# Altium PCB PCB1.PcbDoc
Units mil, origin at the board's own origin, x right, y up, seen from the top; angles counter-clockwise.
Board outline 8750 x 3800 mil, 2 copper layers (Top Layer, Bottom Layer); 78 components, 69 nets, 287 pads, 19 vias.
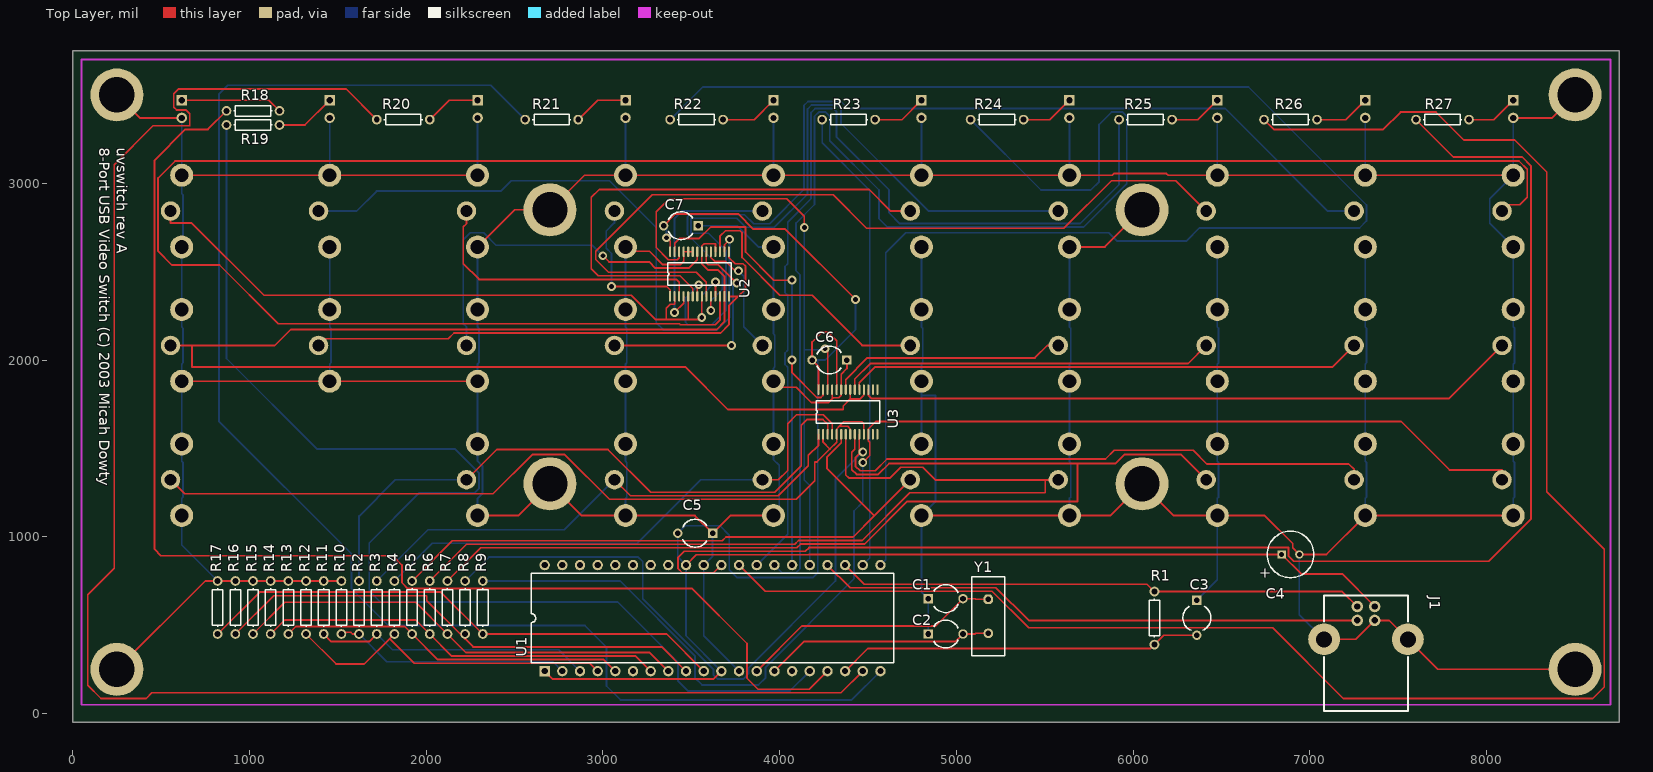
[diagram p0: Top Layer view]
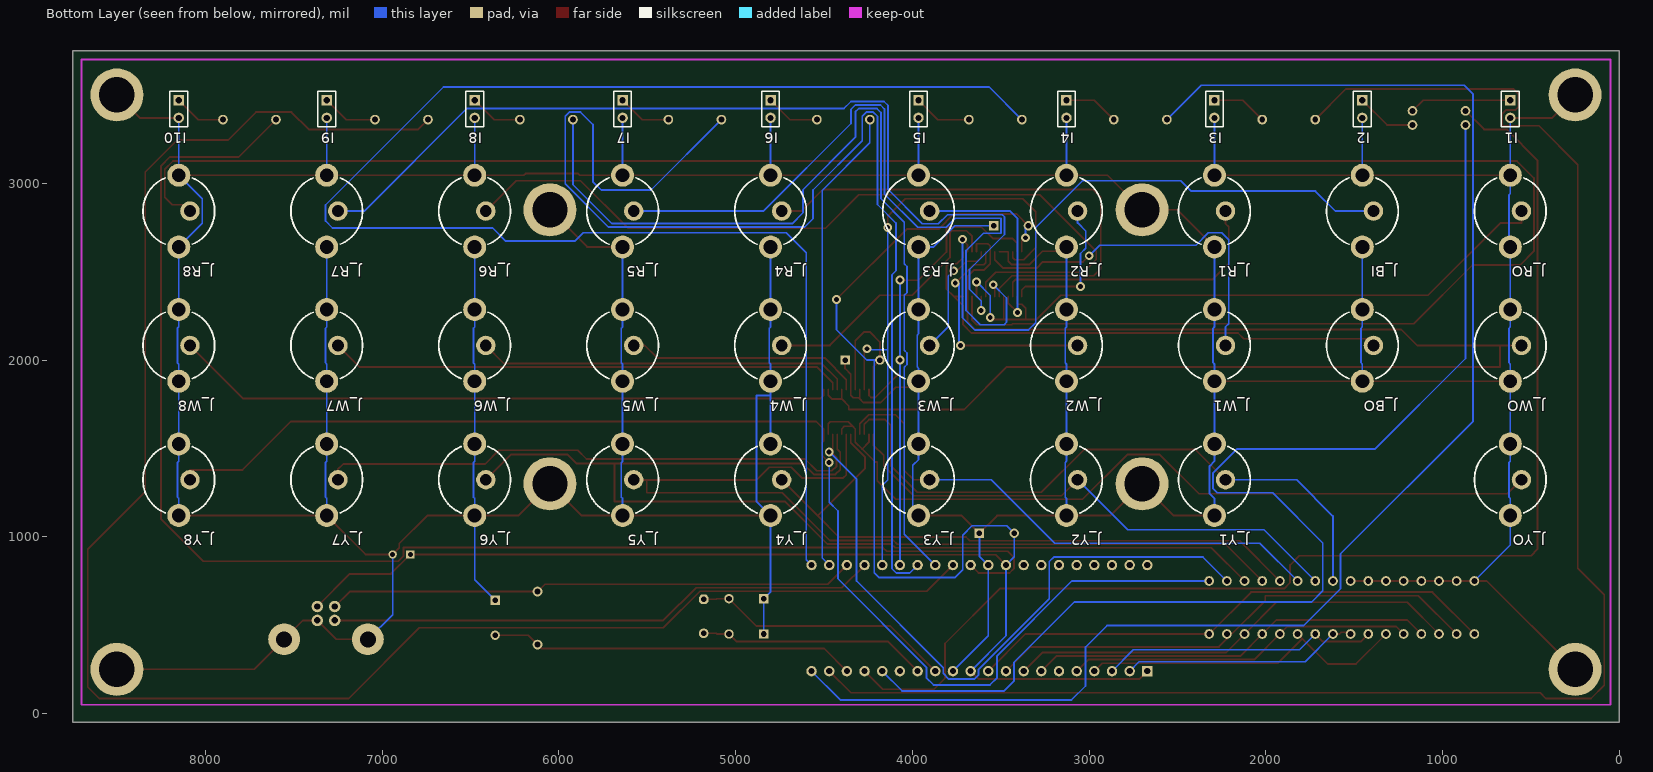
[diagram p1: Bottom Layer view, seen from below]

## Layer stack, top to bottom
Top Layer: signal copper 1.4
Dielectric: dielectric 12.6, FR-4, Dk 4.8
Bottom Layer: signal copper 1.4

## Board outline
0,-50 8750,-50 8750,3750 0,3750

## Design rules (kind name [scope] priority, off if disabled: settings)
Clearance [All] p1: gap=10
ComponentClearance [All] p1: gap=10 collisioncheckmode=0
HoleSize [All] p1: absolutevalues=TRUE maxlimit=200 minlimit=1 maxpercent=80.000 minpercent=20.000
PolygonConnect [All] p1: connectstyle=Relief reliefconductorwidth=10 reliefentries=4 polygonreliefangle="90 Angle"
RoomDefinition Sheet1 [InComponentClass('Sheet1')] p1: confinementstyle=ConfineIn formatcopy=TRUE outline 0,0 8750,0 8750,3750 0,3750
RoutingLayers [All] p1: top layer=Horizontal bottom layer=Vertical
RoutingVias [All] p1: holewidth=28 width=50 viastyle="Through Hole" minholewidth=28 minwidth=50 maxholewidth=28 maxwidth=50
SolderMaskExpansion [All] p1: expansion=4
TestPointUsage [All] p1: valid=0 allowmultiple=FALSE
Testpoint [All] p1: side=15 testpointundercomponent=TRUE minsize=40 maxsize=100 preferedsize=60 minholesize=0 maxholesize=40 preferedholesize=32 testpointgrid=1 style=1023 order=-539222988
Width [All] p1: maxlimit=10 minlimit=10 preferedwidth=10
15 further rules are at their usual default settings.

## Components (designator, comment, footprint, x,y, rotation, side; value= is the part's Value field where it differs from the comment)
C1 "Cap2" CAPR5-4X5 4840,650 r0 top
C2 "Cap2" CAPR5-4X5 4840,450 r0 top
C3 "" CAPR5-4X5 6360,640 r270 top
C4 "10uF" CAP-EE-1 6740,900 r180 top
C5 "" CAPR5-4X5 3620,1020 r180 top
C6 "" CAPR5-4X5 4380,2000 r180 top
C7 "" CAPR5-4X5 3540,2760 r180 top
I1 "" HDR1X2 616.67,3470 r270 bottom
I2 "" HDR1X2 1453.7,3470 r270 bottom
I3 "" HDR1X2 2290.74,3470 r270 bottom
I4 "" HDR1X2 3127.78,3470 r270 bottom
I5 "" HDR1X2 3964.81,3470 r270 bottom
I6 "" HDR1X2 4801.85,3470 r270 bottom
I7 "" HDR1X2 5638.89,3470 r270 bottom
I8 "" HDR1X2 6475.92,3470 r270 bottom
I9 "" HDR1X2 7312.96,3470 r270 bottom
I10 "" HDR1X2 8150,3470 r270 bottom
J1 "USB" USB-TYPEB 7080,420 r0 top
J_BI "" RCJ-02X 1453.7,3045.51 r270 bottom
J_BO "" RCJ-02X 1453.7,2285.51 r270 bottom
J_R1 "" RCJ-02X 2290.74,3045.51 r270 bottom
J_R2 "" RCJ-02X 3127.78,3045.51 r270 bottom
J_R3 "" RCJ-02X 3964.81,3045.51 r270 bottom
J_R4 "" RCJ-02X 4801.85,3045.51 r270 bottom
J_R5 "" RCJ-02X 5638.89,3045.51 r270 bottom
J_R6 "" RCJ-02X 6475.92,3045.51 r270 bottom
J_R7 "" RCJ-02X 7312.96,3045.51 r270 bottom
J_R8 "" RCJ-02X 8150,3045.51 r270 bottom
J_RO "" RCJ-02X 616.67,3045.51 r270 bottom (schematic designator J_YO)
J_W1 "" RCJ-02X 2290.74,2285.51 r270 bottom
J_W2 "" RCJ-02X 3127.78,2285.51 r270 bottom
J_W3 "" RCJ-02X 3964.81,2285.51 r270 bottom
J_W4 "" RCJ-02X 4801.85,2285.51 r270 bottom
J_W5 "" RCJ-02X 5638.89,2285.51 r270 bottom
J_W6 "" RCJ-02X 6475.92,2285.51 r270 bottom
J_W7 "" RCJ-02X 7312.96,2285.51 r270 bottom
J_W8 "" RCJ-02X 8150,2285.51 r270 bottom
J_WO "" RCJ-02X 616.67,2285.51 r270 bottom
J_Y1 "" RCJ-02X 2290.74,1525.51 r270 bottom
J_Y2 "" RCJ-02X 3127.78,1525.51 r270 bottom
J_Y3 "" RCJ-02X 3964.81,1525.51 r270 bottom
J_Y4 "" RCJ-02X 4801.85,1525.51 r270 bottom
J_Y5 "" RCJ-02X 5638.89,1525.51 r270 bottom
J_Y6 "" RCJ-02X 6475.92,1525.51 r270 bottom
J_Y7 "" RCJ-02X 7312.96,1525.51 r270 bottom
J_Y8 "" RCJ-02X 8150,1525.51 r270 bottom
J_YO "" RCJ-02X 616.67,1525.51 r270 bottom
R1 "Res1" AXIAL-0.3 6120,540 r90 top
R2 "" AXIAL-0.3 1620,600 r270 top
R3 "" AXIAL-0.3 1720,600 r270 top
R4 "" AXIAL-0.3 1820,600 r270 top
R5 "" AXIAL-0.3 1920,600 r270 top
R6 "" AXIAL-0.3 2020,600 r270 top
R7 "" AXIAL-0.3 2120,600 r270 top
R8 "" AXIAL-0.3 2220,600 r270 top
R9 "" AXIAL-0.3 2320,600 r270 top
R10 "" AXIAL-0.3 1520,600 r90 top
R11 "" AXIAL-0.3 1420,600 r90 top
R12 "" AXIAL-0.3 1320,600 r90 top
R13 "" AXIAL-0.3 1220,600 r90 top
R14 "" AXIAL-0.3 1120,600 r90 top
R15 "" AXIAL-0.3 1020,600 r90 top
R16 "" AXIAL-0.3 920,600 r90 top
R17 "" AXIAL-0.3 820,600 r90 top
R18 "" AXIAL-0.3 1020,3410 r180 top
R19 "" AXIAL-0.3 1020,3330 r180 top
R20 "" AXIAL-0.3 1870,3360 r180 top
R21 "" AXIAL-0.3 2710,3360 r180 top
R22 "" AXIAL-0.3 3530,3360 r180 top
R23 "" AXIAL-0.3 4390,3360 r180 top
R24 "" AXIAL-0.3 5230,3360 r180 top
R25 "" AXIAL-0.3 6070,3360 r180 top
R26 "" AXIAL-0.3 6890,3360 r180 top
R27 "" AXIAL-0.3 7750,3360 r180 top
U1 "PIC16C765" DIP-40 3620,540 r0 top
U2 "MAX4572" SSOP28 3380,2360 r90 top
U3 "MAX4572" SSOP28 4220,1580 r90 top
Y1 "6 MHz" BCY-W2/E4.7 5180,550 r270 top

## Footprints (in the part's own frame and the unit in brackets; to place one, negate y for a bottom-side part, rotate by r counter-clockwise, add the part's x,y. Pads: shape width x height; smd on the part's side, far side on the other; paste and mask are expansions set on the pad)
AXIAL-0.3 [mm]
  round 1.4 hole 0.85: 1(-3.81,0) 2(3.81,0)
  silkscreen extent -2.77,-0.76 2.77,0.76
BCY-W2/E4.7 [mm]
  oct 1.4x1.4 hole 0.8: 1(-2.44,0)
  round 1.4 hole 0.8: 2(2.44,0)
  silkscreen extent -5.7,-2.35 5.7,2.35
CAP-EE-1 [mm]
  rect 1.2x1.2 hole 0.7: 1(-2.54,0)
  round 1.2 hole 0.7: 2(-5.08,0)
  silkscreen extent -7.15,-3.34 -0.47,3.34
CAPR5-4X5 [mm]
  rect 1.35x1.35 hole 0.8: 1(0,0)
  round 1.35 hole 0.8: 2(5,0)
  silkscreen extent 0.81,-2 4.32,2
DIP-40 [mm]
  rect 1.5x1.5 hole 0.9: 1(-24.13,-7.62)
  round 1.5 hole 0.9: 2(-21.59,-7.62) 3(-19.05,-7.62) 4(-16.51,-7.62) 5(-13.97,-7.62) 6(-11.43,-7.62) 7(-8.89,-7.62) 8(-6.35,-7.62) 9(-3.81,-7.62) 10(-1.27,-7.62) 11(1.27,-7.62) 12(3.81,-7.62) 13(6.35,-7.62) 14(8.89,-7.62) 15(11.43,-7.62) 16(13.97,-7.62) 17(16.51,-7.62) 18(19.05,-7.62) 19(21.59,-7.62) 20(24.13,-7.62) 21(24.13,7.62) 22(21.59,7.62) 23(19.05,7.62) 24(16.51,7.62) 25(13.97,7.62) 26(11.43,7.62) 27(8.89,7.62) 28(6.35,7.62) 29(3.81,7.62) 30(1.27,7.62) 31(-1.27,7.62) 32(-3.81,7.62) 33(-6.35,7.62) 34(-8.89,7.62) 35(-11.43,7.62) 36(-13.97,7.62) 37(-16.51,7.62) 38(-19.05,7.62) 39(-21.59,7.62) 40(-24.13,7.62)
  silkscreen extent -26.05,-6.45 26.05,6.45
HDR1X2 [mm]
  rect 1.5x1.5 hole 0.9: 1(0,0)
  round 1.5 hole 0.9: 2(2.54,0)
  silkscreen extent -1.27,-1.27 3.81,1.27
RCJ-02X [mil]
  round 110 hole 66.93: 1(202.76,62.99)
  round 130 hole 78.74: 2(0,0) 2(405.51,0)
  silkscreen extent 15,-203 391,203
SSOP28 [mm]
  rect 1.5x0.3 smd: 1(0,0)
  oval 1.5x0.3 smd: 2(0,-0.65) 3(0,-1.3) 4(0,-1.95) 5(0,-2.6) 6(0,-3.25) 7(0,-3.9) 8(0,-4.55) 9(0,-5.2) 10(0,-5.85) 11(0,-6.5) 12(0,-7.15) 13(0,-7.8) 14(0,-8.45) 15(6.42,-8.45) 16(6.42,-7.8) 17(6.42,-7.15) 18(6.42,-6.5) 19(6.42,-5.85) 20(6.42,-5.2) 21(6.42,-4.55) 22(6.42,-3.9) 23(6.42,-3.25) 24(6.42,-2.6) 25(6.42,-1.95) 26(6.42,-1.3) 27(6.42,-0.65) 28(6.42,0)
  silkscreen extent 1.59,-8.78 4.83,0.33
USB-TYPEB [mil]
  round 65 hole 36.22: 1(286.22,185.43) 2(187.8,185.43) 3(187.8,106.69) 4(286.22,106.69)
  round 180 hole 90.55: 5(0,0) 5(474.02,0)
  silkscreen extent 0,-406 474,248

## Part data
C1 C2: "Capacitor"
C3 C5 C6 C7: library part Cap2, "Capacitor"
C4: library part "Cap Pol1", "Polarized Capacitor (Radial)"
I1 I2 I3 I4 I5 I6 I7 I8 I9 I10: library part LED1, "Typical RED GaAs LED"
J1: library part "USB Type B", "Header, 4-Pin"
J_BI J_BO J_R1 J_R2 J_R3 J_R4 J_R5 J_R6 J_R7 J_R8 J_RO J_W1 J_W2 J_W3 J_W4 J_W5 J_W6 J_W7 J_W8 J_WO J_Y1 J_Y2 J_Y3 J_Y4 J_Y5 J_Y6 J_Y7 J_Y8 J_YO: library part RCA-COMPACT, "RCA Connector"
R1: "Resistor"
R2 R3 R4 R5 R6 R7 R8 R9 R10 R11 R12 R13 R14 R15 R16 R17 R18 R19 R20 R21 R22 R23 R24 R25 R26 R27: library part Res1, "Resistor"
U1: "EPROM-Based 8-Bit CMOS Microcontroller with USB"
U2 U3: "Serially Controlled, Clickless Audio/Video switch"
Y1: library part XTAL, "Crystal Oscillator"

## Free pads (board coordinates)
  round 300 hole 200: 0(250,250) 0(250,3500) 0(2700,1300) 0(2700,2850) 0(6050,1300) 0(6050,2850) 0(8500,250) 0(8500,3500)

## Via types
v1: diameter 50, hole 28, Top Layer to Bottom Layer, 19 vias

## Nets (pads, with @x,y where several pads share a name; then routed paths per layer and width w, separated by ;. In a path a pad name is that pad's centre, name@x,y a point inside that pad or via, vN(x,y) a via of type N, cw(c..) or ccw(c..) an arc to the next point about the centre after c; other vN are vias at no path point)
GND: C1.1 C2.1 C3.1 C4.2 C5.1 C6.1 C7.1 I1.2 I2.2 I3.2 I4.2 I5.2 I6.2 I7.2 I8.2 I9.2 I10.2 J1.4 J1.5 J_BI.2 J_BO.2 J_R1.2 J_R2.2 J_R3.2 J_R4.2 J_R5.2 J_R6.2 J_R7.2 J_R8.2 J_RO.2 J_W1.2 J_W2.2 J_W3.2 J_W4.2 J_W5.2 J_W6.2 J_W7.2 J_W8.2 J_WO.2 J_Y1.2 J_Y2.2 J_Y3.2 J_Y4.2 J_Y5.2 J_Y6.2 J_Y7.2 J_Y8.2 J_YO.2 pad.0 R10.2 R11.2 R12.2 R13.2 R14.2 R15.2 R16.2 R17.2 U1.12 U1.31 U2.23 U2.24 U2.25 U3.23 U3.25 | length 43302.9
  Top Layer w10: pad.0@250,250 750,750 R17.2 R16.2 R15.2 R14.2 R13.2 R12.2 R11.2 R10.2 ; pad.0@250,3500 380,3370 I1.2 ; J_WO.2@616.67,1880 1453.7,1880 J_W1.2@2290.74,1880 ; J_RO.2@616.67,3045.51 1453.7,3045.51 J_R1.2@2290.74,3045.51 ; J_Y1.2@2290.74,1120 2520,1120 2700,1300 2880,1120 3127.78,1120 3520,1120 C5.1 3720,1120 J_Y3.2@3964.81,1120 ; J_R1.2@2290.74,2640 2500.74,2850 2700,2850 2895.51,3045.51 3127.78,3045.51 3964.81,3045.51 4801.85,3045.51 5638.89,3045.51 5881,3045.51 5890.49,3055 6188,3055 6197.49,3045.51 6475.92,3045.51 7312.96,3045.51 J_R8.2@8150,3045.51 ; J_R2.2@3127.78,2640 3127.78,2616 3263,2616 3339,2540 3436.77,2540 3456.77,2560 U2.25 U2.24 U2.23 ; J_W3.2@3964.81,1880 3964.81,1846 4093,1846 4179,1760 4276.77,1760 4296.77,1780 ; U3.25 4296.77,1780 ; C6.1 4380,1952.05 4347.95,1920 U3.23 4347.95,1800 4334.95,1787 4303.77,1787 4296.77,1780 ; J_Y4.2@4801.85,1120 5638.89,1120 5870,1120 6050,1300 6230,1120 6475.92,1120 6744,1120 6902,962 6902,938 C4.2 7092.96,900 7312.96,1120 J_Y8.2@8150,1120 ; J_R5.2@5638.89,2640 5840,2640 pad.0@6050,2850 ; J1.5@7080,420 7259.53,420 J1.4 7447.32,526.69 7554.02,420 7724.02,250 pad.0@8500,250 ; I10.2 8370,3370 pad.0@8500,3500
  Bottom Layer w10: I1.2 616.67,3045.51 616.67,2941.33 624,2934 624,2647.33 616.67,2640 616.67,2285.51 616.67,2187.33 624,2180 624,1984.33 616.67,1977 616.67,1880 616.67,1525.51 616.67,1427.33 624,1420 624,1224.33 616.67,1217 616.67,1120 616.67,953.33 R17.2 ; J_BO.2@1453.7,1880 1453.7,1977 1461,1984.3 1461,2180 1453.7,2187.3 1453.7,2285.51 J_BI.2@1453.7,2640 ; J_BI.2@1453.7,3045.51 I2.2 ; J_Y1.2@2290.74,1120 2290.74,1217 2318,1244.26 2318,1400 2290.74,1427.26 2290.74,1525.51 2290.74,1880 2290.74,1977 2298,1984.26 2298,2180 2290.74,2187.26 2290.74,2285.51 J_R1.2@2290.74,2640 ; J_R1.2@2290.74,3045.51 I3.2 ; J_Y2.2@3127.78,1120 3127.78,1217 3135,1224.22 3135,1420 3127.78,1427.22 3127.78,1525.51 3127.78,1880 3127.78,1977 3135,1984.22 3135,2180 3127.78,2187.22 3127.78,2285.51 J_R2.2@3127.78,2640 ; J_R2.2@3127.78,3045.51 I4.2 ; C7.1 3759,2760 3879,2640 3964.81,2640 3964.81,2285.51 3964.81,2148.19 3972,2141 3972,1961 3964.81,1953.81 3964.81,1880 3964.81,1525.51 3964.81,1436.19 3997,1404 3997,1152.19 J_Y3.2@3964.81,1120 ; C5.1 3620,890 U1.31 3570,440 U1.12 ; J_R3.2@3964.81,3045.51 I5.2 ; J_Y4.2@4801.85,1525.51 4802,1525.66 4802,1799.85 ; J_R4.2@4801.85,2640 4801.85,2285.51 4801.85,2187.15 4809,2180 4809,1984.15 4801.85,1977 4801.85,1880 4801.85,1800.15 4802,1800 4802,1799.85 ; J_R4.2@4801.85,3045.51 I6.2 ; C2.1 C1.1 4801.85,688.15 4801.85,1120 4882,1200.15 4882,1799.85 4802,1799.85 ; J_Y5.2@5638.89,1120 5638.89,1217 5646,1224.11 5646,1420 5638.89,1427.11 5638.89,1525.51 5638.89,1880 5638.89,1977 5646,1984.11 5646,2180 5638.89,2187.11 5638.89,2285.51 J_R5.2@5638.89,2640 ; J_R5.2@5638.89,3045.51 I7.2 ; C3.1 6475.92,755.92 6475.92,1120 6475.92,1217 6483,1224.08 6483,1420 6475.92,1427.08 6475.92,1525.51 6475.92,1880 6475.92,1977 6483,1984.08 6483,2180 6475.92,2187.08 6475.92,2285.51 J_R6.2@6475.92,2640 ; J_R6.2@6475.92,3045.51 I8.2 ; C4.2 6940,560 J1.5@7080,420 ; J_Y7.2@7312.96,1120 7312.96,1217 7320,1224.04 7320,1420 7312.96,1427.04 7312.96,1525.51 7312.96,1880 7312.96,1977 7320,1984.04 7320,2180 7312.96,2187.04 7312.96,2285.51 J_R7.2@7312.96,2640 ; J_R7.2@7312.96,3045.51 I9.2 ; J_Y8.2@8150,1120 8150,1217 8158,1225 8158,1420 8150,1428 8150,1525.51 8150,1880 8150,1977 8158,1985 8158,2180 8150,2188 8150,2285.51 8150,2640 8017,2773 8017,2912.51 8150,3045.51 I10.2
NetC1_2: C1.2 U1.13 Y1.1 | length 1481.5
  Top Layer w10: U1.13 4125,495 4881.85,495 C1.2 5106,650 5109.94,646.06 Y1.1
NetC2_2: C2.2 U1.14 Y1.2 | length 1298.6
  Top Layer w10: U1.14 4138,408 4994.85,408 C2.2 5106,450 5109.94,453.94 Y1.2
NetC3_2: C3.2 R1.1 U1.18 | length 2074.1
  Top Layer w10: U1.18 4498,368 6098,368 R1.1 6173.15,443.15 C3.2
NetI1_1: I1.1 R18.1 | length 578.2
  Top Layer w10: I1.1 1110,3470 R18.1
NetI2_1: I2.1 R19.1 | length 341.7
  Top Layer w10: R19.1 1313.7,3330 I2.1
NetI3_1: I3.1 R20.1 | length 316.3
  Top Layer w10: R20.1 2130,3470 I3.1
NetI4_1: I4.1 R21.1 | length 313.3
  Top Layer w10: R21.1 2970,3470 I4.1
NetI5_1: I5.1 R22.1 | length 330.4
  Top Layer w10: R22.1 3854.81,3360 I5.1
NetI6_1: I6.1 R23.1 | length 307.4
  Top Layer w10: R23.1 4691.85,3360 I6.1
NetI7_1: I7.1 R24.1 | length 304.5
  Top Layer w10: R24.1 5528.89,3360 I7.1
NetI8_1: I8.1 R25.1 | length 301.5
  Top Layer w10: R25.1 6365.92,3360 I8.1
NetI9_1: I9.1 R26.1 | length 318.5
  Top Layer w10: R26.1 7202.96,3360 I9.1
NetI10_1: I10.1 R27.1 | length 295.6
  Top Layer w10: R27.1 8040,3360 I10.1
NetJ1_2: J1.2 R1.2 U1.23 | length 2995
  Top Layer w10: U1.23 4478,732 6078,732 R1.2 7183.23,690 J1.2
NetJ1_3: J1.3 U1.24 | length 3127.6
  Top Layer w10: U1.24 4398,712 5223,712 5408.31,526.69 J1.3
NetJ_BI_1: J_BI.1 U2.16 | length 3616.6
  Top Layer w10: U2.16 3687.09,2651.09 3716,2680 v1(3716,2683)
  Bottom Layer w10: J_BI.1 1605.76,2842.76 1719,2956 2421,2956 2480,3015 3037,3015 3302,2750 3302,2211 3343,2170 3646,2170 3716,2240 v1(3716,2683)
NetJ_BO_1: J_BO.1 U2.14 U2.15 | length 2961.7
  Top Layer w10: J_BO.1 1390.71,2120 2124.24,2120 2157.24,2153 3666,2153 3712.68,2199.68 3712.68,2307.68 3765,2360 ; U2.14 3765,2360 ; U2.15 3712.68,2580 3747.68,2545 3792,2545 3807,2530 3807,2402 3765,2360
NetJ_R1_1: J_R1.1 U2.3 | length 1649.8
  Top Layer w10: J_R1.1 2227.75,2771.75 2210,2754 2210,2545 2299,2456 3415.18,2456 3431.18,2440 U2.3
NetJ_R2_1: J_R2.1 U2.1 | length 834
  Top Layer w10: v1(3048,2416) 3360,2416 3380,2396 U2.1
  Bottom Layer w10: v1(3048,2416) 3048,2603 3019,2632 3019,2730 3064.79,2775.79 J_R2.1
NetJ_R3_1: J_R3.1 U2.4 | length 1159.4
  Top Layer w10: v1(3404,2269) 3456.77,2321.77 U2.4
  Bottom Layer w10: v1(3404,2269) 3404,2800 3446.76,2842.76 J_R3.1
NetJ_R4_1: J_R4.1 U2.6 | length 2942.5
  Top Layer w10: U2.6 3507.95,2405 3435.95,2477 2974,2477 2934,2517 2934,2920 2979,2965 4507,2965 4629.24,2842.76 J_R4.1
NetJ_R5_1: J_R5.1 U2.7 | length 4210.1
  Top Layer w10: U2.7 3533.54,2423 3542,2423 v1(3542,2426)
  Bottom Layer w10: v1(3542,2426) 3467,2351 3467,2213.47 3480.47,2200 3615,2200 3696,2281 3696,2619 3597,2718 3498.42,2718 3498.42,2802 3757,2802 3808,2751 3970,2751 4157,2938 4157,3420 4180,3443 4323,3443 4347,3419 4347,3338.56 4842.8,2842.76 J_R5.1
NetJ_R6_1: J_R6.1 U2.9 | length 4652.7
  Top Layer w10: U2.9 3584.72,2440 3527.72,2497 3031,2497 2959,2569 2959,2615 3279,2935 4302,2935 4491,2746 5608,2746 5877,3015 6240.69,3015 J_R6.1
NetJ_R7_1: J_R7.1 U2.10 | length 5339.3
  Top Layer w10: v1(3610,2280) 3610.32,2280.32 U2.10
  Bottom Layer w10: v1(3610,2280) 3610,2334 3676,2400 3676,2512 3478,2710 3478,2810 3490,2822 3801,2822 3852,2771 3943,2771 4137,2965 4137,3440 4160,3463 4347,3463 4387,3423 6520,3423 7100.24,2842.76 J_R7.1
NetJ_R8_1: J_R8.1 U2.12 | length 12071
  Top Layer w10: U2.12 3661.5,2226 3635.5,2200 3438,2200 3433,2205 1163.14,2205 830.14,2538 560,2538 483,2615 483,3030 579,3126 8183,3126 8230,3079 8230,2920 8188,2878 8087.01,2878 J_R8.1
NetJ_RO_1: J_RO.1 U2.2 U2.5 U2.8 U2.11 | length 4036.7
  Top Layer w10: J_RO.1 553.67,2775 673,2775 1082,2366 3161,2366 3298,2229 3358,2229 ; U2.2 3405.59,2315 3380,2315 3358,2293 3358,2229 ; U2.5 3482.36,2229 ; v1(3559,2240) v1@3559.13,2240.13 ; U2.8 v1@3559.13,2240.13 ; U2.11 v1(3635.91,2442) ; 3358,2229 3482.36,2229 ; 3482.36,2229 3548.13,2229 3559.07,2239.93 3559.13,2240 v1@3559.13,2240.13
  Bottom Layer w10: v1(3559,2240) 3559,2365.09 v1(3635.91,2442)
NetJ_W1_1: J_W1.1 U2.22 | length 2092.2
  Top Layer w10: v1(2999,2590) 3034,2555 3261,2555 3296,2520 3485.54,2520 3533.54,2568 U2.22
  Bottom Layer w10: J_W1.1 2227.75,2188.25 2210,2206 2210,2680 2250,2720 2325,2720 2395,2650 2939,2650 v1(2999,2590)
NetJ_W2_1: J_W2.1 U2.20 | length 1321.3
  Top Layer w10: J_W2.1 v1(3727,2082.76) ; U2.20 3584.72,2550 3595.72,2539 3653,2539 v1(3757,2435)
  Bottom Layer w10: v1(3727,2082.76) 3736,2091.76 3736,2434 3737,2435 v1(3757,2435)
NetJ_W3_1: J_W3.1 U2.19 | length 698.6
  Top Layer w10: U2.19 3610.32,2580 3631.32,2559 3693,2559 3747,2505 v1(3767,2505)
  Bottom Layer w10: v1(3767,2505) 3797,2475 3797,2187.58 J_W3.1
NetJ_W4_1: J_W4.1 U2.17 | length 1528.8
  Top Layer w10: U2.17 3661.5,2700 3693.5,2732 3775,2732 3787,2720 3787,2580 4001,2366 4183,2366 4466.24,2082.76 J_W4.1
NetJ_W5_1: J_W5.1 U3.22 | length 1339.2
  Top Layer w10: U3.22 4373.54,1889.54 4496,2012 5444,2012 5514.76,2082.76 J_W5.1
NetJ_W6_1: J_W6.1 U3.20 | length 2126.9
  Top Layer w10: U3.20 4424.72,1892.72 4512,1980 6310.18,1980 J_W6.1
NetJ_W7_1: J_W7.1 U3.19 | length 2926.4
  Top Layer w10: U3.19 4450.32,1872.32 4538,1960 7127.21,1960 J_W7.1
NetJ_W8_1: J_W8.1 U3.17 | length 3749.5
  Top Layer w10: U3.17 4501.5,1800 4518.5,1783 7787.25,1783 J_W8.1
NetJ_WO_1: J_WO.1 U2.13 U2.18 U2.21 U3.18 U3.21 | length 7984.2
  Top Layer w10: J_WO.1 553.67,2082 675.43,2082 ; U2.18 3635.91,2658 3572,2658 3559.13,2645.13 U2.21 3559.13,2544.87 3595,2509 3652.09,2509 3687.09,2474 U2.13 3687.09,2216.09 3644,2173 1233,2173 1142,2082 675.43,2082 ; U3.21 4399.13,1780 ; U3.18 4475.91,1800 4455.91,1780 4399.13,1780 ; 675.43,2082 675.43,1961 3465,1961 3706,1720 4359.13,1720 4359.13,1740 4399.13,1780
NetJ_Y1_1: J_Y1.1 R2.1 U3.3 | length 3646.6
  Top Layer w10: J_Y1.1 2398.99,1494 3028,1494 3270,1252 3972,1252 4122,1402 4122,1631 4154,1663 4245,1663 4271.18,1636.82 U3.3
  Bottom Layer w10: R2.1 1620,1117 1825.76,1322.76 J_Y1.1
NetJ_Y2_1: J_Y2.1 R3.1 U3.1 | length 2989.3
  Top Layer w10: J_Y2.1 3155.54,1232 3992,1232 4162,1402 4162,1461 4220,1519 U3.1
  Bottom Layer w10: R3.1 2010,1040 2782.03,1040 J_Y2.1
NetJ_Y3_1: J_Y3.1 R4.1 U3.4 | length 3102.1
  Top Layer w10: J_Y3.1 3992.76,1322.76 4045,1375 4045,1640 4095,1690 4246.77,1690 4296.77,1640 U3.4
  Bottom Layer w10: R4.1 2033,963 3193,963 3552.76,1322.76 J_Y3.1
NetJ_Y4_1: J_Y4.1 R5.1 U3.6 | length 3660.9
  Top Layer w10: R5.1 2148,978 3675,978 3696,999 4415.1,999 4535.05,1118.95 ; U3.6 4347.95,1531.95 4268,1452 4268,1386 4535.05,1118.95 ; J_Y4.1 4535.05,1118.95
NetJ_Y5_1: J_Y5.1 R6.1 U3.7 | length 5256.1
  Top Layer w10: R6.1 2228,958 4085,958 4106,979 4466,979 4736,1249 5502.14,1249 5502.14,1322 ; U3.7 4373.54,1349.46 4390,1333 4625,1333 4685,1393 4809,1393 4880,1322 5502.14,1322 ; J_Y5.1 5575.14,1322 5502.14,1322
NetJ_Y6_1: J_Y6.1 R7.1 U3.9 | length 6293.8
  Top Layer w10: R7.1 2308,938 4097,938 4118,959 4480,959 4721,1200 5685,1200 5685,1414 ; U3.9 4424.72,1495.72 4408,1479 4408,1380 4435,1353 4557,1353 4618,1414 5685,1414 ; J_Y6.1 6270.69,1465 5950,1465 5899,1414 5685,1414
NetJ_Y7_1: J_Y7.1 R8.1 U3.10 | length 6822.3
  Top Layer w10: U3.10 4450.32,1499.68 ; v1(4470,1480) 4450.32,1499.68 ; J_Y7.1 7249.97,1382.03 7220,1412 6417,1412 6340,1489 5892,1489 5843,1440 4607,1440 4540,1373 4455,1373 4428,1400 4428,1448 4450.32,1470.32 4450.32,1480 4450.32,1499.68
  Bottom Layer w10: R8.1 2355,885 3200,885 3225,860 3225,650 3625,250 3625,220.47 3650.47,195 3793,195 3825,227 3825,260 4315,750 4315,1325 v1(4470,1480)
NetJ_Y8_1: J_Y8.1 R9.1 U3.12 | length 7360.7
  Top Layer w10: v1(4470,1420) 4510,1460 4510,1535 4501.5,1543.5 U3.12 4501.5,1610 4543.5,1652 7516,1652 7790,1378 8087.01,1378 J_Y8.1
  Bottom Layer w10: R9.1 3096.71,750 3520,326.71 3520,202 3560,162 3880,162 3920,202 3920,262 4420,762 4420,1146 4470,1196 v1(4470,1420)
NetJ_YO_1: J_YO.1 U3.2 U3.5 U3.8 U3.11 | length 4701.8
  Top Layer w10: J_YO.1 633.43,1243 2378,1243 2600,1465 2784,1465 3037,1212 4093,1212 4198,1317 4198,1423 4210.36,1423 4283.98,1496.61 ; U3.2 4245.59,1535 4283.98,1496.61 ; U3.8 4399.13,1610 4384.13,1625 4337.36,1625 ; U3.11 4475.91,1640.09 4465,1651 4363.36,1651 4337.36,1625 ; 4283.98,1496.61 4322.36,1535 U3.5 4322.36,1610 4337.36,1625
NetR2_2: R2.2 R10.1 U1.2 | length 1345.3
  Top Layer w10: R10.1 1530,460 1573,460 1583,450 R2.2
  Bottom Layer w10: R2.2 1777,293 2717,293 U1.2
NetR3_2: R3.2 R11.1 U1.3 | length 1572.6
  Top Layer w10: R11.1 1463,407 1677,407 R3.2
  Bottom Layer w10: R3.2 1809,361 2749,361 U1.3
NetR4_2: R4.2 R12.1 U1.4 | length 1893.2
  Top Layer w10: R12.1 1490,280 1650,280 1793.75,423.75 ; R4.2 1793.75,423.75 ; U1.4 2925,285 1932.5,285 1793.75,423.75
NetR5_2: R5.2 R13.1 U1.5 | length 1972.6
  Top Layer w10: R13.1 1263,493 1877,493 R5.2 2065,305 3005,305 U1.5
NetR6_2: R6.2 R14.1 U1.7 | length 2302.4
  Top Layer w10: R14.1 1199,529 1941,529 R6.2 2145,325 3185,325 U1.7
NetR7_2: R7.2 R15.1 U1.8 | length 2585.3
  Top Layer w10: R15.1 1199,629 1941,629 R7.2 2225,345 3265,345 U1.8
NetR8_2: R8.2 R16.1 U1.9 | length 2861.2
  Top Layer w10: R16.1 1137,667 2003,667 2003,639 2206,436 2220,422 ; R8.2 2220,422 ; U1.9 3333,377 2265,377 2220,422
NetR9_2: R9.2 R17.1 U1.10 | length 3033.3
  Top Layer w10: R17.1 1057,687 2083,687 R9.2 3360,450 U1.10
NetR18_2: R18.2 U1.17 | length 7074.9
  Top Layer w10: R18.2 765,3305 637,3305 463,3131 463,929 499,893 1810,893 1863,840 1863,740 1896,707 3504,707 3815,396 3815,200 3877,138 4168,138 U1.17
NetR19_2: R19.2 U1.16 | length 6962.1
  Bottom Layer w10: R19.2 870,2009 1383,1496 2164,1496 2298,1362 2298,1272 2275,1249 1961,1249 1677,965 1677,694 1740,631 3083,631 3425,289 3425,183 3480,128 4058,128 U1.16
NetR20_2: R20.2 U1.19 | length 9486.5
  Top Layer w10: R20.2 1546,3534 600,3534 572,3506 572,3430 587,3415 640,3415 662,3393 662,3326 661,3325 454,3325 235,3106 235,821 85,671 85,160 160,85 415,85 447,117 4347,117 U1.19
NetR21_2: R21.2 U1.20 | length 8392.9
  Bottom Layer w10: R21.2 2365,3555 878,3555 827,3504 827,1653 1577,903 1577,707 1786,498 2898,498 3020,376 3020,156 3099,77 4407,77 U1.20
NetR22_2: R22.2 U1.21 | length 8995.7
  Bottom Layer w10: R22.2 3565,3545 6652,3545 7320,2877 7320,2787 7280,2747 6374,2747 6300,2673 5909,2673 5862,2720 4714,2720 4600,2606 4600,870 U1.21
NetR23_2: R23.2 U1.22 | length 2648.4
  Bottom Layer w10: R23.2 4240,3229 4510,2959 4510,880 U1.22
NetR24_2: R24.2 U1.27 | length 6922.5
  Bottom Layer w10: U1.27 4015,795 4090,795 4115,820 4115,2483 4092,2506 4092,2775 4197,2880 4197,3379.56 4220.44,3403 4259.56,3403 4283,3379.56 4283,3241 4562,2962 4562,2800 4610,2752 5718.65,2752 5963,2996.35 5963,3380 5940,3403 5877.44,3403 5807,3332.56 5807,3009 5760,2962 5478,2962 R24.2
NetR25_2: R25.2 U1.28 | length 5353.2
  Bottom Layer w10: U1.28 4045,1015 4045,1960 4030,1975 4030,2040 4045,2055 4045,2366 4030,2381 4030,2529 4045,2544 4045,2780 4177,2912 4177,3400 4200,3423 4303,3423 4322,3404 4322,3260 4618,2964 4618,2834 4680,2772 5699,2772 5920,2993 R25.2
NetR26_2: R26.2 U1.29 | length 10087.1
  Top Layer w10: U1.29 3918,692 5201,692 5408,485 6789,485 7189,85 8600,85 8665,150 8665,930 8340,1255 8340,3064 8159,3245 7871,3245 7713,3403 7513,3403 7415,3305 6795,3305 R26.2
NetR27_2: R27.2 U1.30 | length 8102.9
  Top Layer w10: U1.30 3625,795 3450,795 3425,820 3425,884 3459,918 4145,918 4166,939 6879,939 6879,890 6908,861 8011,861 8250,1100 8250,3099 8200,3149 7811,3149 R27.2
NetU1_6: U1.6
NetU1_25: U1.25 U2.26 U3.26 | length 3652.5
  Top Layer w10: U2.26 3431.18,2579.18 3420,2568 3370,2568 3301,2637 3301,2840 3374,2913 4039,2913 4139,2813 v1(4139,2750) ; v1(4256,2064) 4271.18,2048.82 U3.26
  Bottom Layer w10: v1(4139,2750) 4139,2058 ; U1.25 4170,1290 4139,1321 4139,2058 ; v1(4256,2064) 4250,2058 4139,2058
NetU1_26: U1.26 U2.27 U3.27 | length 2912.8
  Top Layer w10: U2.27 3405.59,2660 3433.59,2688 3545,2688 3610,2753 3806,2753 3807,2752 3807,2611 3966,2452 v1(4070,2452) ; v1(4070,2000) 4070,1928 4210,1788 4233.59,1788 4245.59,1800 U3.27
  Bottom Layer w10: U1.26 v1(4070,2000) v1(4070,2452)
NetU?_13: 
NetU?_14: 
VCC: C4.1 C5.2 C6.2 C7.2 J1.1 U1.1 U1.11 U1.32 U2.28 U3.24 U3.28 | length 10940.8
  Top Layer w10: U1.1 2715,195 3625,195 U1.11 ; C7.2 3410.15,2827 3765,2827 3851,2741 4031,2741 v1(4429,2343) ; v1(3360,2692) 3360.28,2692 3380,2672.28 U2.28 ; U1.32 3528,898 4163,898 4165,900 C4.1 6950,790 7181.66,790 J1.1 ; U3.28 4220,1963.15 C6.2 4183.15,2102.15 4240,2159 4272,2159 4322.36,2108.64 U3.24
  Bottom Layer w10: C7.2 3360,2760 v1(3360,2692) ; U1.11 3470,440 U1.32 3423.15,886.85 C5.2 3465.15,1062 3662,1062 3715,1009 3715,814 3760,769 4187,769 4215,797 4215,2000 ; C6.2 4215,2000 ; v1(4429,2343) 4429,2172.15 4256.85,2000 4215,2000
pads on no net: U1.15 U1.33 U1.34 U1.35 U1.36 U1.37 U1.38 U1.39 U1.40 U3.13 U3.14 U3.15 U3.16

## Keep-outs
Keep-Out Layer:
  lines w10: 50,50 50,3250 50,3700 8700,3700 8700,50 50,50

## Silkscreen, mask and mechanical layers (free items; w line width, h text height)
Top Overlay:
  text "8-Port USB Video Switch (C) 2003 Micah Dowty" at 150,3200 h60 r270
  text "uvswitch rev A" at 250,3200 h60 r270

## Text inside footprints (layer, text, board x,y; h text height)
C4: Top Overlay "+" at 6780,820 h59.06 r180